# EAGLE board WeatherChimesV2.6 (EAGLE 9.6.2)
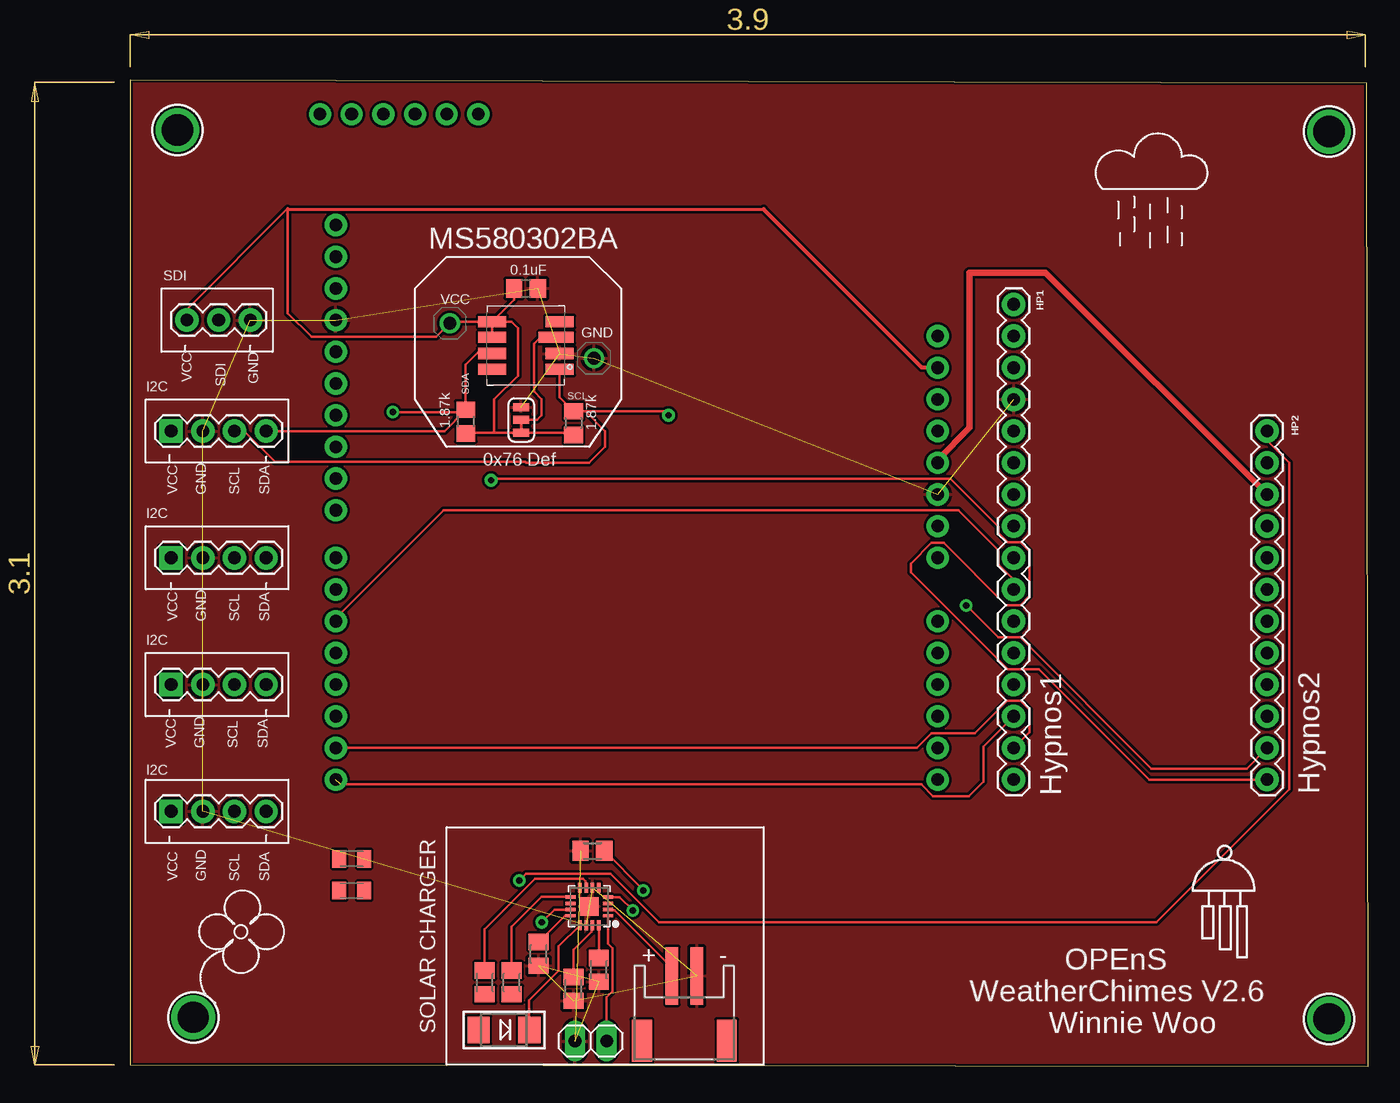
[diagram p0: board, top side]
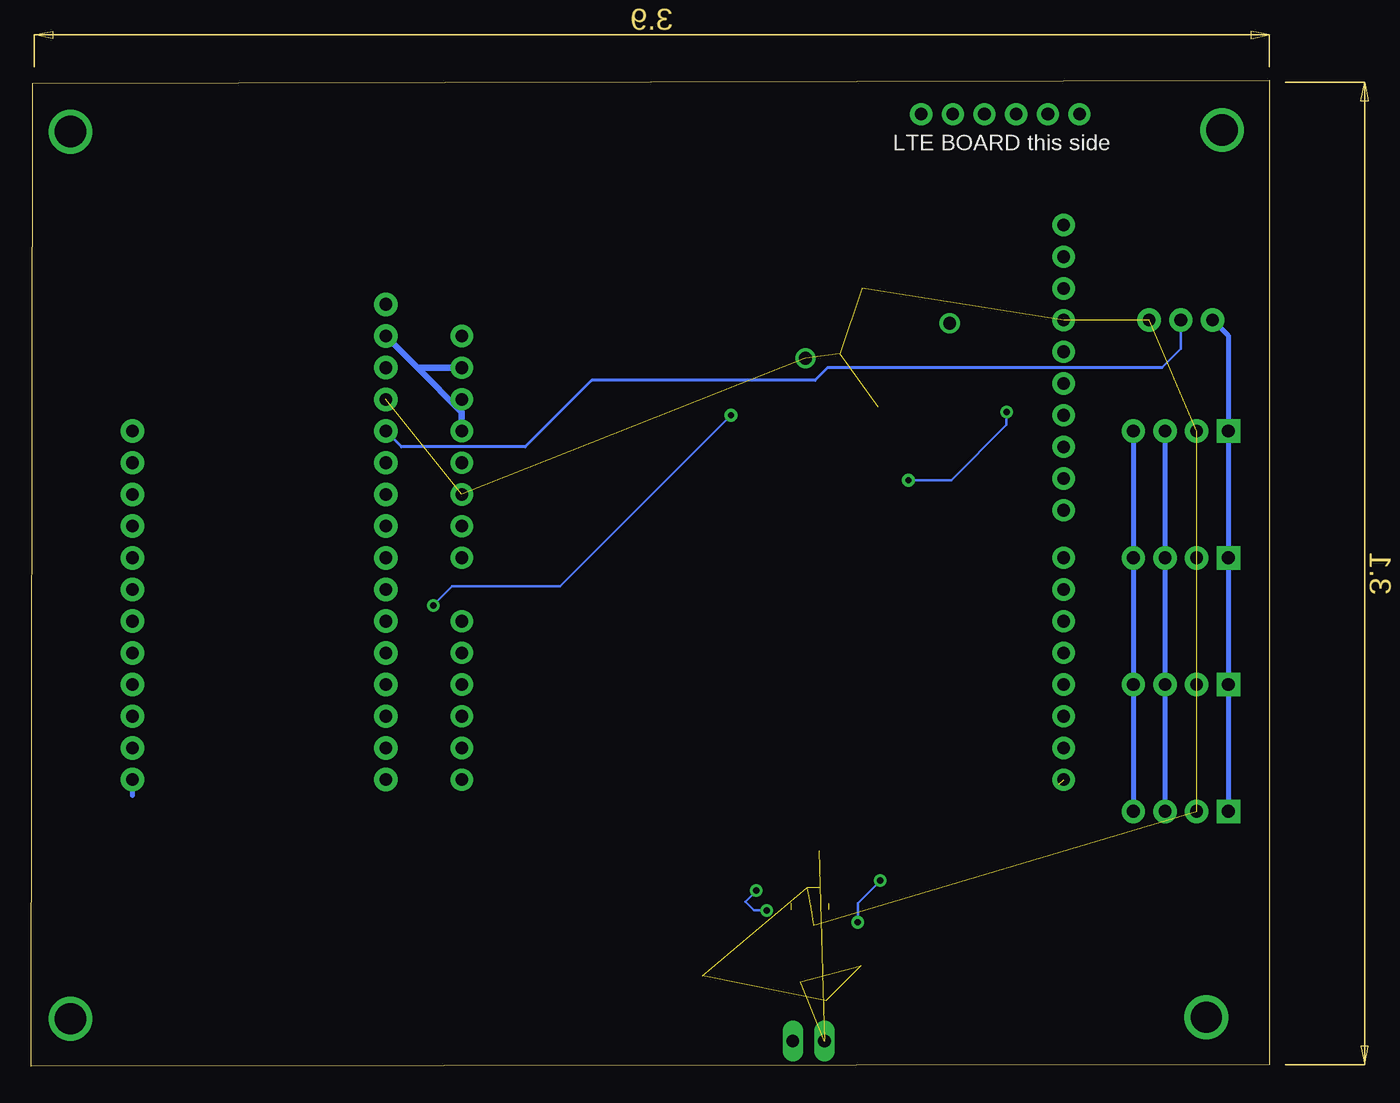
[diagram p1: board, bottom side, seen from below]

Size 99.29 x 79.05 mm. Coordinates in mm from the lower left corner, seen from the top.
Outline: 0,0.13 99.29,0 99.17,78.79 0,79.05 0,0.13
Copper layers (1*16): Top 0.035mm / dielectric 1.5mm / Bottom 0.035mm
Design rules "SparkFun": minimum track width 8mil, minimum drill 20mil, track to track 8mil, track to pad 8mil, pad to pad 8mil, via to via 8mil, smd to smd 8mil, copper to edge 8mil, drill to drill 8mil, minimum pad ring 12mil, minimum via ring 10mil, stop-mask expansion 4mil, vias tented up to drill 20mil, thermal gap 10mil

## Footprints (pad centres in the part's own frame; a part is rotated, then mirrored left to right if it is on the bottom)
JST-PH-2-SMT-RA = smd 1 x 4.6: 1 1,-3.7; 2 -1,-3.7 | smd 1.6 x 3.4: NC1 -3.4,1.5; NC2 3.4,1.5
C0805 = smd 1.3 x 1.5: 1 -0.95,0; 2 0.95,0
C0805K = smd 1.1 x 1.4: 1 -1,0; 2 1,0
SMADIODE = smd 1.778 x 2.159: A 2.019,0; C -2.045,0
1X16 = drill 1.016 pad 1.88: 1 0,0; 2 2.54,0; 3 5.08,0; 4 7.62,0; 5 10.16,0; 6 12.7,0; 7 15.24,0; 8 17.78,0; 9 20.32,0; 10 22.86,0; 11 25.4,0; 12 27.94,0; 13 30.48,0; 14 33.02,0; 15 35.56,0; 16 38.1,0
1X12 = drill 1.016 pad 1.88: 1 0,0; 2 2.54,0; 3 5.08,0; 4 7.62,0; 5 10.16,0; 6 12.7,0; 7 15.24,0; 8 17.78,0; 9 20.32,0; 10 22.86,0; 11 25.4,0; 12 27.94,0
1X04 = drill 1.016 pad 1.88 square: 1 0,0 | drill 1.016 pad 1.88: 2 2.54,0; 3 5.08,0; 4 7.62,0
1X01 = drill 1.016: 1 0,0
1X02 = drill 1.016 long: 1 -1.27,0; 2 1.27,0
R0805 = smd 1.3 x 1.5: 1 -0.95,0; 2 0.95,0
M0805 = smd 1.3 x 1.6: 1 -0.95,0; 2 0.95,0
SMT-JUMPER_3_1-NC_TRACE_SILK = smd 0.635 x 1.27: 1 -1.016,0; 2 0,0; 3 1.016,0
1X03 = drill 1.016 pad 1.88: 1 0,0; 2 2.54,0; 3 5.08,0
MS5803-02BA = smd 2.8 x 0.9: CSB 2.42,0.65 | smd 2.25 x 0.9: GND 2.7,-0.65; NC 2.7,1.9; PS -2.7,0.65; SCLK 2.7,-1.9; SDI/SDA -2.7,-0.65; SDO -2.7,-1.9; VDD -2.7,1.9
LTE_BOARD_FOOTPRINT = drill 1.016 pad 1.778: 0 35.56,48.26; 1 33.02,48.26; 2 30.48,48.26; 3 27.94,48.26; 3.3V 7.62,0; 4 25.4,48.26; 5 22.86,48.26; 5V 10.16,0; 6 20.32,48.26; 7 17.78,48.26; 8 13.97,48.26; 9 11.43,48.26; 10 8.89,48.26; 11 6.35,48.26; 12 3.81,48.26; 13 1.27,48.26; A0 22.86,0; A1 25.4,0; A2 27.94,0; A3 30.48,0; A4 33.02,0; A5 35.56,0; AREF -3.81,48.26; BLANK 0,0; GND 15.24,0; GND1 12.7,0; GND2 -17.78,36.83; GND3 -1.27,48.26; IOREF 2.54,0; NC -17.78,49.53; NC1 -17.78,39.37; RST 5.08,0; RX -17.78,44.45; SCL -8.89,48.26; SDA -6.35,48.26; TX -17.78,46.99; VIN 17.78,0; VIO -17.78,41.91
MOUNTINGHOLE_2.5_PLATED = drill 2.5 pad 3.2: P$1 0,0
QFN16_3MM = smd 0.8 x 0.28: 1 -1.5,0.75; 2 -1.5,0.25; 3 -1.5,-0.25; 4 -1.5,-0.75; 9 1.5,-0.75; 10 1.5,-0.25; 11 1.5,0.25; 12 1.5,0.75 | smd 0.28 x 0.8: 5 -0.75,-1.5; 6 -0.25,-1.5; 7 0.25,-1.5; 8 0.75,-1.5; 13 0.75,1.5; 14 0.25,1.5; 15 -0.25,1.5; 16 -0.75,1.5 | smd 1.5 x 1.5: THERMAL 0,0

## Placement (x,y rotation side)
BATT  JST 2PH  [JST-PH-2-SMT-RA]  44.45,3.56 180 top
C1  0.1uF  [C0805]  31.75,62.36 0 top
C5  10uF  [C0805K]  17.78,14.1 180 top
C6  10uF  [C0805K]  17.78,16.64 180 top
D2  SK34A  [SMADIODE]  29.97,2.92 180 top
HP1  [1X16]  70.87,61.09 270 top
HP2  [1X12]  91.19,50.93 270 top
J1  [1X04]  3.3,50.93 0 top
J2  [1X04]  3.3,40.77 0 top
J3  [1X04]  3.3,30.61 0 top
J4  [1X04]  3.3,20.45 0 top
JP4  VCC  [1X01]  25.65,59.56 0 top
JP5  GND  [1X01]  37.21,56.77 0 top
JP8  [1X02]  36.96,2.03 180 top
R1  1.87k  [R0805]  26.92,51.69 270 top
R2  1.87k  [R0805]  35.56,51.56 270 top
R3  1K  [M0805]  32.77,9.02 270 top
R4  10K  [M0805]  35.56,6.22 270 top
R7  10K  [M0805]  30.61,6.73 270 top
R8  10K  [M0805]  37.08,17.27 180 top
R9  1K  [M0805]  37.59,7.75 270 top
R11  10K  [M0805]  28.45,6.73 270 top
SJ1  JUMPER-SMT_3_1-NC_TRACE_SILK  [SMT-JUMPER_3_1-NC_TRACE_SILK]  31.37,51.82 270 top
SW_D11  [1X03]  4.57,59.82 0 top
U1  MS5803-02BA  [MS5803-02BA]  31.75,57.78 0 top
U$1  LTE_BOARD  [LTE_BOARD_FOOTPRINT]  64.77,58.55 270 bottom
U$2  MOUNTINGHOLE2.5  [MOUNTINGHOLE_2.5_PLATED]  5.08,3.94 0 top
U$3  MOUNTINGHOLE2.5  [MOUNTINGHOLE_2.5_PLATED]  3.81,75.06 0 top
U$4  MOUNTINGHOLE2.5  [MOUNTINGHOLE_2.5_PLATED]  96.14,74.93 0 top
U$5  MOUNTINGHOLE2.5  [MOUNTINGHOLE_2.5_PLATED]  96.14,3.81 0 top
X4  BQ24074  [QFN16_3MM]  36.83,12.83 180 top

## Library data of the parts
BATT C5 C6 R3 R4 R7-R9 R11 = adafruit
C1 = rcl; SPICEPREFIX: C
D2 = microbuilder
HP1 HP2 SW_D11 = SparkFun-Connectors
J1-J4 = SparkFun-Connectors; PROD_ID: CONN-09696
JP4 JP5 = pinhead_simple
JP8 = pinhead
R1 R2 = rcl; SPICEPREFIX: R
SJ1 = SparkFun-Jumpers
U1 = PNNL_Probe
U$1 = LTE_BOARD
U$2-U$5 = microbuilder; BOM: EXCLUDE
X4 = adafruit_power

## Nets
3VSWITCH: HP2.10
4GONOFF: HP1.10 U$1.5
5VRAIL: HP2.3 U$1.5V
5VSWITCH: HP2.9
!CE: R8.1 X4.4
!CHG: R7.1 X4.9
!PGOOD: R11.1 X4.7
A1: HP1.6
A2: HP1.7
A3: HP1.8
AREF: HP1.3
CHARGER_IN: D2.A
EN: HP2.2
GND: BATT.2 C1.2 HP1.4 J1.2 J2.2 J3.2 J4.2 JP5.1 JP8.2 R3.2 R4.2 R8.2 R9.2 SJ1.1 SW_D11.3 U1.GND U$1.GND1 U$1.GND3 X4.6 X4.8 X4.14 X4.THERMAL
ILIM: R3.1 X4.12
ISET: R9.1 X4.16
ITERM: R4.1 X4.15
MISO: HP1.13
MOSI: HP1.12
N$1: X4.5
N$2: D2.C X4.13
N$3: SJ1.2 U1.CSB
P9: HP2.8
P10: HP2.7
P11: HP2.6
P12: HP2.5
P13: HP2.4
PGOOD: HP1.9
RST: HP1.1
RX: HP1.14 U$1.0
SCK: HP1.11
SCL: HP2.11 J1.3 J2.3 J3.3 J4.3 R2.1 U1.SCLK
SDA: HP2.12 J1.4 J2.4 J3.4 J4.4 R1.1 U1.SDI/SDA
SDI: HP1.5 SW_D11.2
SPEC: HP1.16
THERM: JP8.1 X4.1
TX: HP1.15 U$1.1
VBAT: HP2.1 X4.10 X4.11
VCC: C1.1 HP1.2 J1.1 J2.1 J3.1 J4.1 JP4.1 R1.2 R2.2 SJ1.3 SW_D11.1 U1.PS U1.VDD U$1.3.3V U$1.IOREF
VLIPO: BATT.1 X4.2 X4.3

## Tracks (layer width: path | path; a pad name or v marks a point on that pad's centre or on a via)
4GONOFF
  Top 0.203: U$1.5 16.51,35.94 25.15,44.58 66.42,44.58 69.62,41.38 69.62,40.25 70.87,39.01 HP1.10
  Top 0.254: HP1.10 70.87,38.99
5VRAIL
  Top 0.508: HP2.3 73.41,63.63 67.31,63.63 67.31,51.18 64.77,48.64 U$1.5V
!CE  (via drill 0.51)
  Top 0.203: v41.15,14.1 41.15,14.16 R8.1 | v40.32,12.51 39.25,13.58 X4.4
  Bottom 0.203: v41.15,14.1 42.04,13.21 41.34,12.51 v40.32,12.51
!CHG
  Top 0.203: 30.99,8.06 R7.1 30.61,11.18 33.02,13.59 35.32,13.59 X4.9
!PGOOD
  Top 0.203: X4.7 36.53,14.38 36.53,14.85 36.35,15.03 32.5,15.03 28.45,10.98 R11.1
GND  (21 unrouted)
  pour Top: 0,78.87 99.19,78.87 99.19,0.13 0,0.13
ILIM
  Top 0.203: R3.1 34.88,12.08 X4.12
ISET
  Top 0.203: R9.1 37.59,11.31 X4.16
ITERM
  Top 0.203: X4.15 37.03,11.27 37.03,10.8 35.56,9.34 R4.1
N$2
  Top 0.203: D2.C 32.02,5.31 34.38,7.67 34.38,9.63 X4.13
N$3
  Top 0.203: SJ1.2 32.64,51.82 33.02,52.2 33.02,53.47 32.38,54.1 32.38,57.91 32.91,58.44 U1.CSB
RX  (1 unrouted)
  Top 0.203: 16.89,22.61 63.46,22.61 64.4,21.67 67.26,21.67 68.42,22.83 68.42,25.62 HP1.14
SCL  (via drill 0.51)
  Top 0.203: U1.SCLK 34.45,53.62 R2.1 36.52,52.51 | J1.3 9.16,50.93 11.63,48.46 31.67,48.46 31.75,48.39 36.83,48.39 38.1,49.66 38.1,50.93 36.52,52.51 | HP2.11 89.53,23.88 81.9,23.88 71.38,34.39 69.62,34.39 v67.06,36.96 | v43.18,52.2 42.87,52.51 36.52,52.51
  Bottom 0.203: v67.06,36.96 65.53,38.48 56.9,38.48 v43.18,52.2
  Bottom 0.406: J1.3 J2.3 J3.3 J4.3
SDA  (via drill 0.51)
  Top 0.203: R1.1 26.92,56.26 27.94,57.28 28.91,57.28 U1.SDI/SDA | R1.1 25.21,50.93 J1.4 | HP2.12 81.73,22.99 72.87,31.85 70.48,31.85 70.38,31.85 62.61,39.62 62.61,40.3 64.28,41.96 65.26,41.96 70.24,36.98 71.38,36.98 72.11,37.71 72.11,41.28 71.38,42.01 70.4,42.01 69.62,42.79 69.62,43.26 65.77,47.12 29.08,47.12 v28.96,46.99 | v21.08,52.45 26.74,52.45 R1.1
  Bottom 0.203: v28.96,46.99 25.53,46.99 21.08,51.44 v21.08,52.45
  Bottom 0.406: J1.4 J2.4 J3.4 J4.4 | HP2.12 91.19,21.72
SDI
  Bottom 0.203: 8.64,56.01 7.11,57.53 SW_D11.2
  Bottom 0.254: SW_D11.2 7.11,59.05 | HP1.5 69.6,49.66 59.69,49.66 54.36,54.99 36.45,54.99 35.43,56.01 8.64,56.01
THERM
  Top 0.203: JP8.1 38.23,5.55 38.7,6.02 38.7,9.47 38.33,9.84 X4.1
TX
  Top 0.203: U$1.1 63.08,25.53 64.28,26.72 67.76,26.72 70.35,29.31 71.38,29.31 72.11,28.58 72.11,26.8 72.11,26.77 HP1.15
VBAT  (via drill 0.51)  (1 unrouted)
  Top 0.203: HP2.1 91.19,50.15 92.94,48.39 92.94,22.2 82.3,11.56 42.42,11.56 38.54,15.44 31.75,15.44 v31.21,14.89 | 35.28,13.13 X4.10 | X4.11 34.04,12.58 v33.02,11.56
  Bottom 0.203: v31.21,14.89 33.02,13.08 v33.02,11.56
VCC
  Top 0.203: U1.VDD 25.78,59.69 JP4.1 24.56,58.47 14.55,58.47 12.64,60.39 12.64,68.64 | U1.VDD U1.PS | U1.VDD 30.8,61.44 C1.1 | 29.21,50.8 SJ1.3 35.37,50.8 R2.2 | U1.VDD 30.61,59.69 31.11,59.18 31.11,55.37 29.21,53.47 29.21,50.8 | R1.2 26.98,50.8 29.21,50.8 | SW_D11.1 4.57,60.71 12.64,68.77 12.64,68.64 | 12.64,68.64 12.7,68.71
  Top 0.254: 12.7,68.71 50.8,68.71
  Top 0.305: U$1.IOREF 63.5,56.01 50.8,68.71
  Bottom 0.406: J4.1 J3.1 J2.1 J1.1 3.3,58.55 SW_D11.1
  Bottom 0.508: HP1.2 68.33,56.01 | 68.33,56.01 U$1.IOREF | 68.33,56.01 64.77,52.45 U$1.3.3V
VLIPO  (1 unrouted)
  Top 0.203: X4.2 38.39,12.52 38.86,12.52 43.45,7.93 BATT.1

## Text on the board
tPlace: MS580302BA | 0.1uF | SDI | VCC | GND | SDI | VCC | GND | I2C | 1.87k | 1.87k | 0x76 Def | VCC | GND | SCL | SDA | I2C | VCC | GND | SCL | SDA | I2C | VCC | GND | SCL | SDA | I2C | Hypnos1 | Hypnos2 | VCC | GND | SCL | SDA | SOLAR CHARGER
bPlace: LTE BOARD this side
tNames: SDA | SCL | OPEnS | WeatherChimes V2.6 | Winnie Woo